# Altium PCB PCB1.PcbDoc
Units mil, origin at the board's own origin, x right, y up, seen from the top; angles counter-clockwise.
Board outline 3342 x 3050 mil, 2 copper layers (Top Layer, Bottom Layer); 9 components, 22 nets, 238 pads, 33 vias.
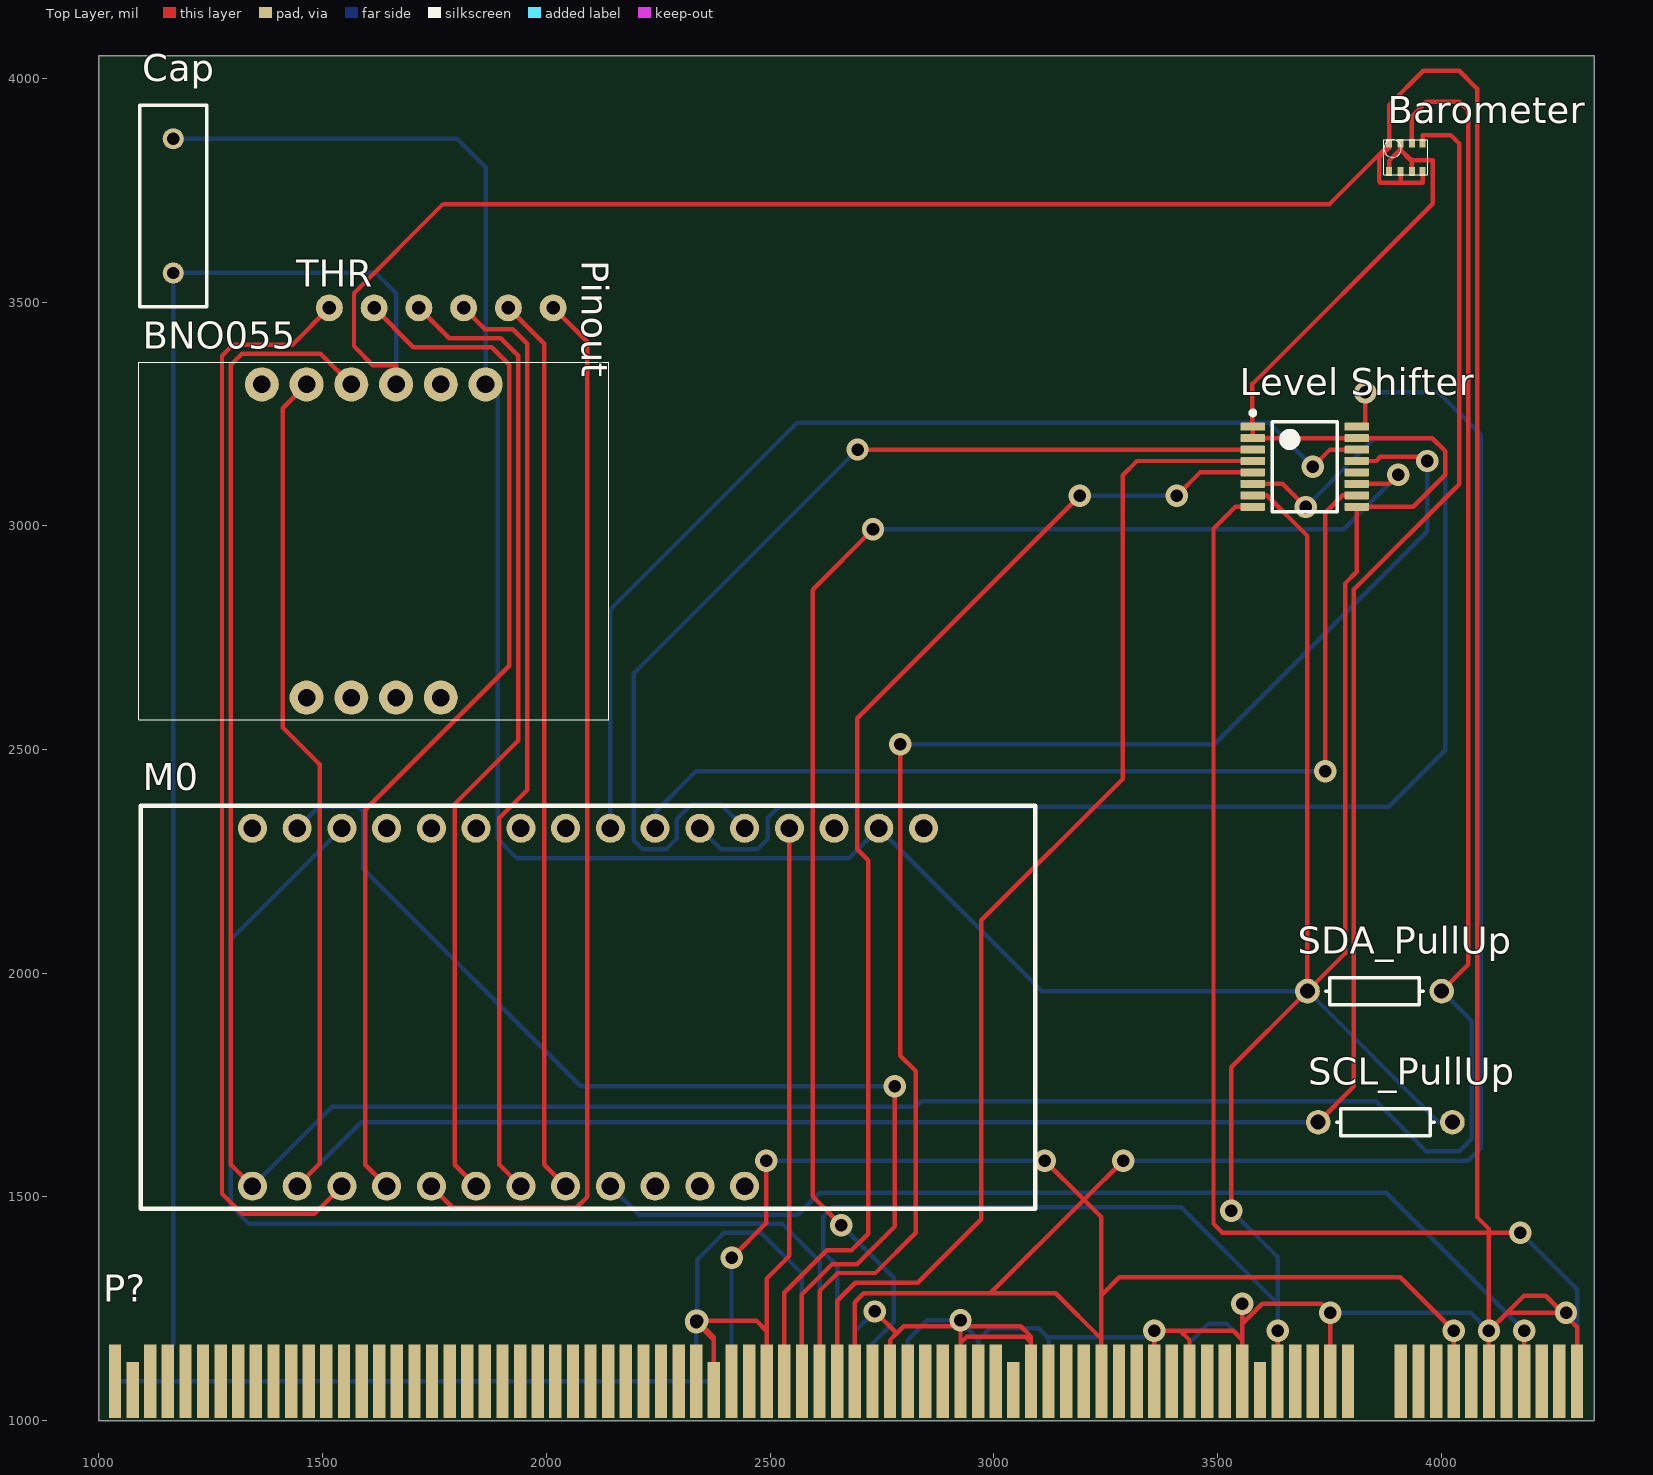
[diagram p0: Top Layer view]
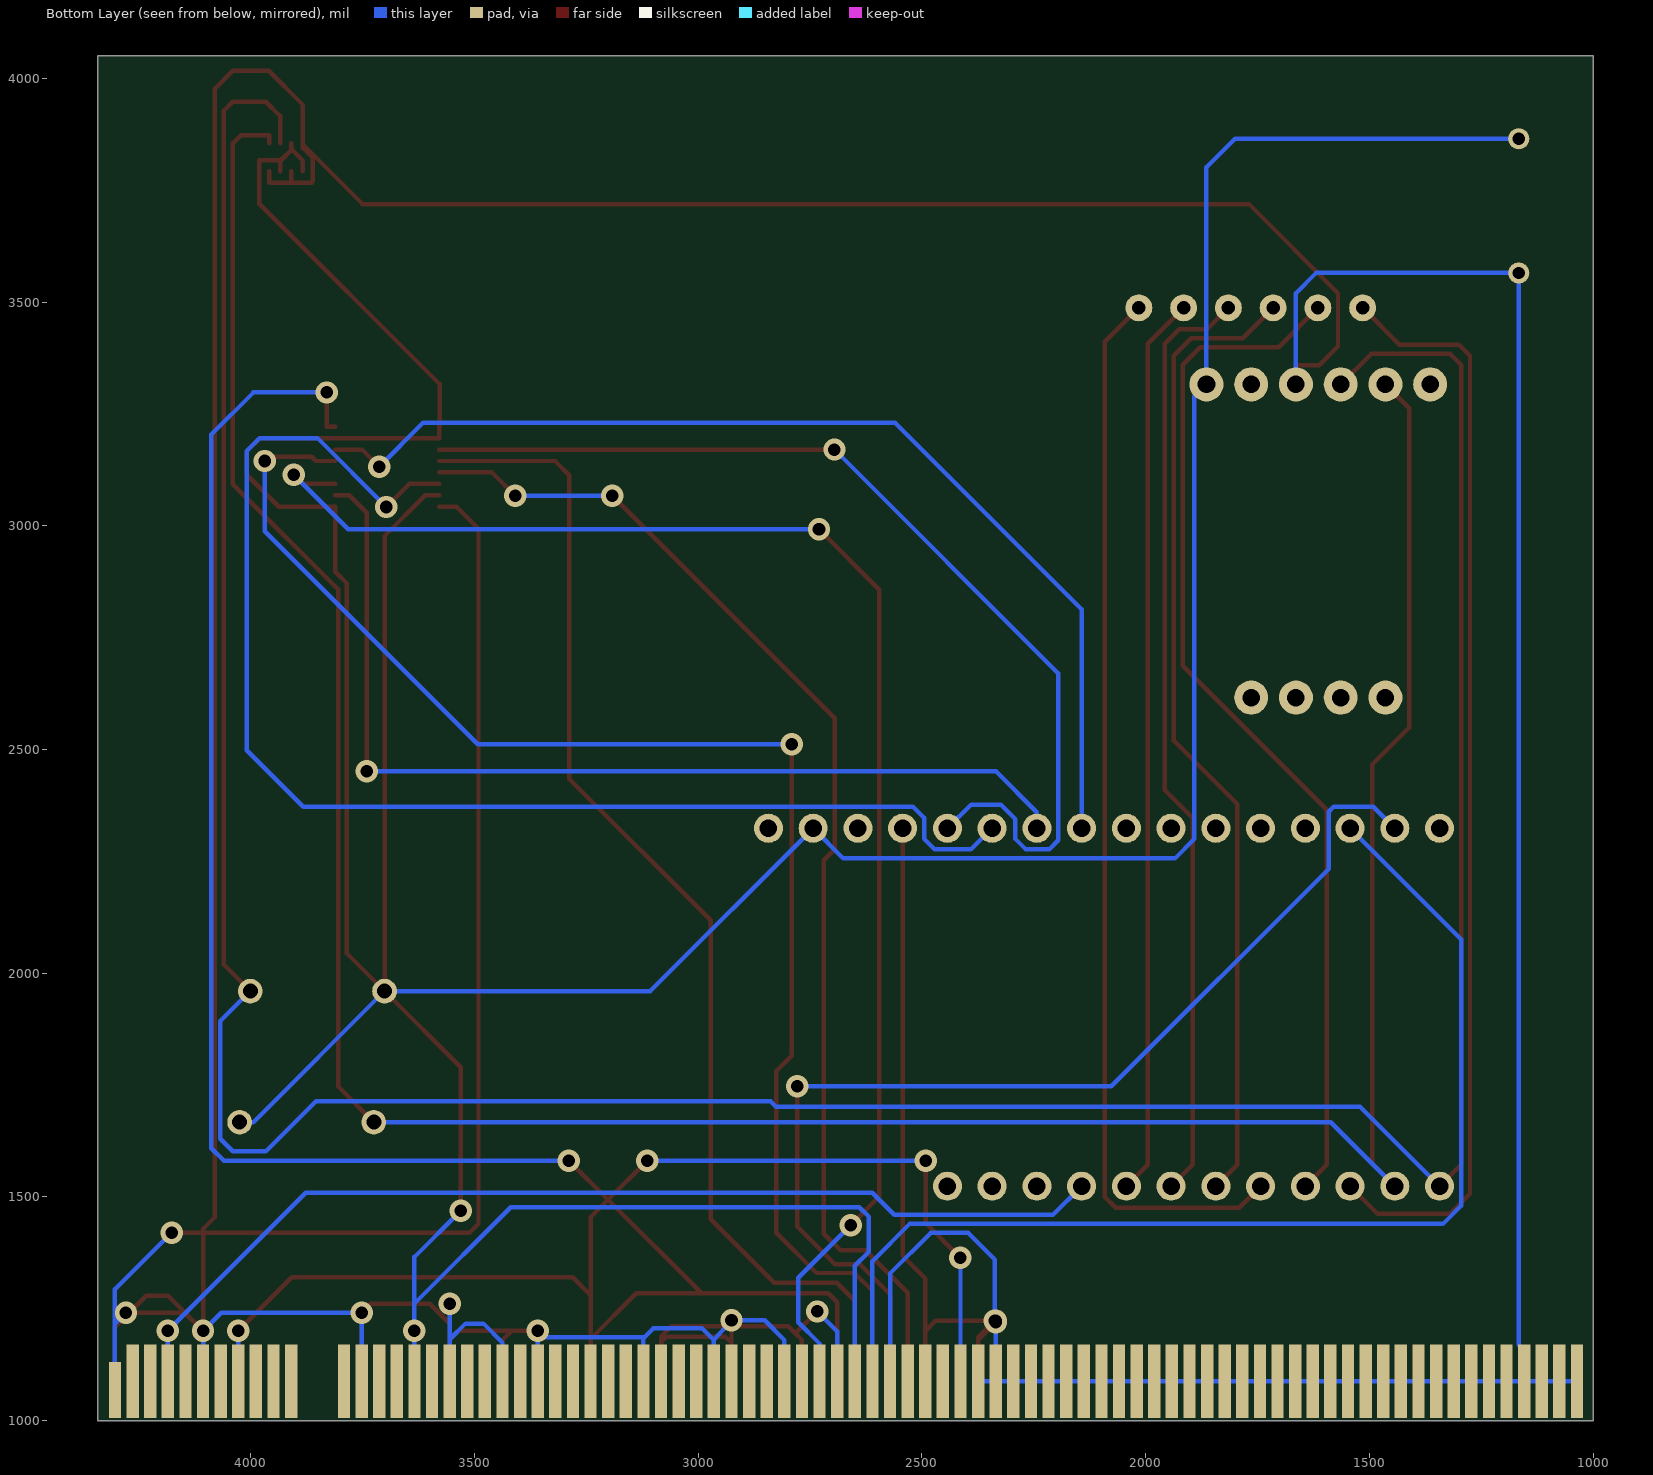
[diagram p1: Bottom Layer view, seen from below]

## Layer stack, top to bottom
Top Solder: solder mask 0.4, Solder Resist, Dk 3.5
Top Layer: signal copper 1.4
Dielectric 1: dielectric 12.6, FR-4, Dk 4.8
Bottom Layer: signal copper 1.4
Bottom Solder: solder mask 0.4, Solder Resist, Dk 3.5

## Board outline
1000,1000 4342,1000 4342,4050 1000,4050

## Design rules (kind name [scope] priority, off if disabled: settings)
Clearance [All] p1: gap=10 ignorepadtopadclearanceinfootprint=FALSE except(0: Arc-Hole Track-Hole SMDPad-Hole THPad-Hole Via-Hole Fill-Hole Poly-Hole Region-Hole Text-Hole)
PolygonConnect [All] p1: connectstyle=Relief reliefconductorwidth=10 reliefentries=4 polygonreliefangle="90 Angle" airgapwidth=10
RoutingVias [All] p1: holewidth=28 width=50 viastyle="Through Hole" minholewidth=28 minwidth=50 maxholewidth=28 maxwidth=50
SolderMaskExpansion [All] p1: expansion=4
Width [All] p1: maxlimit=10 minlimit=10 preferedwidth=10
30 further rules are at their usual default settings.

## Classes and differential pairs
component class U_FlightControllerBoard: Barometer BNO055 Cap "Level Shifter" M0 Pinout SCL_PullUp SDA_PullUp
component class PCIE: P?

## Components (designator, comment, footprint, x,y, rotation, side; value= is the part's Value field where it differs from the comment)
Barometer "BMP280" BMP280 3970.02,3784.13 r90 top
BNO055 "BNO055 Pinout" BNO055 2139,3366 r180 top
Cap "Cap" RAD-0.3 1166,3715 r90 top value=100pF
"Level Shifter" "CD40109BPWR" PW0016A_N 3695,3132 r0 top
M0 "M0_pinout" M0 3093,2374 r180 top
P? "PCIeX16-GF-2D-1000-1K-O164" PCIeX16-GF-2D-1000-1K-O164 3929.48,1088 r180 top
Pinout "Reciever Pinout" Reciever 1515,3487 r0 top
SCL_PullUp "Res1" AXIAL-0.3 3875,1667 r180 top value=1K
SDA_PullUp "Res1" AXIAL-0.3 3851,1960 r0 top value=1K

## Footprints (in the part's own frame and the unit in brackets; to place one, negate y for a bottom-side part, rotate by r counter-clockwise, add the part's x,y. Pads: shape width x height; smd on the part's side, far side on the other; paste and mask are expansions set on the pad)
AXIAL-0.3 [mm] "Axial Device, Thru-Hole; 2 Leads; 0.3 in Pin Spacing"
  round 1.4 hole 0.85: 1(-3.81,0) 2(3.81,0)
  silkscreen extent -2.77,-0.76 2.77,0.76
BMP280 [mm]
  rect 0.5x0.35 smd: CSB(1.8,1.55) GND(0.2,1.55) GND(1.8,2.2) SCK(1.8,0.3) SDI(1.8,0.9) SDO(0.2,0.3) VDD(0.2,2.2) VDDIO(0.2,0.9)
  silkscreen extent 0,0 2,2.5
BNO055 [mil]
  round 76 hole 39.37: 3VO(375,50) ADR(675,750) GND(475,50) INT(575,750) PS0(375,750) PS1(475,750) RST(775,50) SCL(675,50) SDA(575,50) VIN(275,50)
  silkscreen extent 0,0 1050,800
M0 [mil]
  round 65 hole 39.37: 3.3V(350,50) 5(1550,850) 6(1450,850) 9(1350,850) 10(1250,850) 11(1150,850) 12(1050,850) 13(950,850) A0(650,50) A1(750,50) A2(850,50) A3(950,50) A4(1050,50) A5(1150,50) ARf(450,50) BAT(650,850) En(750,850) GND(550,50) io1(1750,50) MIS(1450,50) MOS(1350,50) RST(250,50) RX0(1550,50) SCK(1250,50) SCL(1650,850) SDA(1750,850) TX1(1650,50) USB(850,850)
  silkscreen extent 0,0 2000,900
PCIeX16-GF-2D-1000-1K-O164 [mm] "Golden finger, PCIeX16, Dual, Opposite, Pitch 1mm, 164-Position"
  rect 0.7x3.2 smd far side paste-1: A1(-9.5,0.5)
  rect 0.7x4.2 smd far side paste-1: A2(-8.5,0) A3(-7.5,0) A4(-6.5,0) A5(-5.5,0) A6(-4.5,0) A7(-3.5,0) A8(-2.5,0) A9(-1.5,0) A10(-0.5,0) A11(0.5,0) A12(3.5,0) A13(4.5,0) A14(5.5,0) A15(6.5,0) A16(7.5,0) A17(8.5,0) A18(9.5,0) A19(10.5,0) A20(11.5,0) A21(12.5,0) A22(13.5,0) A23(14.5,0) A24(15.5,0) A25(16.5,0) A26(17.5,0) A27(18.5,0) A28(19.5,0) A29(20.5,0) A30(21.5,0) A31(22.5,0) A32(23.5,0) A33(24.5,0) A34(25.5,0) A35(26.5,0) A36(27.5,0) A37(28.5,0) A38(29.5,0) A39(30.5,0) A40(31.5,0) A41(32.5,0) A42(33.5,0) A43(34.5,0) A44(35.5,0) A45(36.5,0) A46(37.5,0) A47(38.5,0) A48(39.5,0) A49(40.5,0) A50(41.5,0) A51(42.5,0) A52(43.5,0) A53(44.5,0) A54(45.5,0) A55(46.5,0) A56(47.5,0) A57(48.5,0) A58(49.5,0) A59(50.5,0) A60(51.5,0) A61(52.5,0) A62(53.5,0) A63(54.5,0) A64(55.5,0) A65(56.5,0) A66(57.5,0) A67(58.5,0) A68(59.5,0) A69(60.5,0) A70(61.5,0) A71(62.5,0) A72(63.5,0) A73(64.5,0) A74(65.5,0) A75(66.5,0) A76(67.5,0) A77(68.5,0) A78(69.5,0) A79(70.5,0) A80(71.5,0) A81(72.5,0) A82(73.5,0)
  rect 0.7x4.2 smd paste-1: B1(-9.5,0) B2(-8.5,0) B3(-7.5,0) B4(-6.5,0) B5(-5.5,0) B6(-4.5,0) B7(-3.5,0) B8(-2.5,0) B9(-1.5,0) B10(-0.5,0) B11(0.5,0) B12(3.5,0) B13(4.5,0) B14(5.5,0) B15(6.5,0) B16(7.5,0) B18(9.5,0) B19(10.5,0) B20(11.5,0) B21(12.5,0) B22(13.5,0) B23(14.5,0) B24(15.5,0) B25(16.5,0) B26(17.5,0) B27(18.5,0) B28(19.5,0) B29(20.5,0) B30(21.5,0) B32(23.5,0) B33(24.5,0) B34(25.5,0) B35(26.5,0) B36(27.5,0) B37(28.5,0) B38(29.5,0) B39(30.5,0) B40(31.5,0) B41(32.5,0) B42(33.5,0) B43(34.5,0) B44(35.5,0) B45(36.5,0) B46(37.5,0) B47(38.5,0) B49(40.5,0) B50(41.5,0) B51(42.5,0) B52(43.5,0) B53(44.5,0) B54(45.5,0) B55(46.5,0) B56(47.5,0) B57(48.5,0) B58(49.5,0) B59(50.5,0) B60(51.5,0) B61(52.5,0) B62(53.5,0) B63(54.5,0) B64(55.5,0) B65(56.5,0) B66(57.5,0) B67(58.5,0) B68(59.5,0) B69(60.5,0) B70(61.5,0) B71(62.5,0) B72(63.5,0) B73(64.5,0) B74(65.5,0) B75(66.5,0) B76(67.5,0) B77(68.5,0) B78(69.5,0) B79(70.5,0) B80(71.5,0) B82(73.5,0)
  rect 0.7x3.2 smd paste-1: B17(8.5,0.5) B31(22.5,0.5) B48(39.5,0.5) B81(72.5,0.5)
PW0016A_N [mm] "SOP, 16-Leads, Body 5.1x4.5mm, Pitch 0.65mm, IPC Medium Density"
  rrect22% 1.4x0.45 smd: 1(-2.95,2.275) 2(-2.95,1.625) 3(-2.95,0.975) 4(-2.95,0.325) 5(-2.95,-0.325) 6(-2.95,-0.975) 7(-2.95,-1.625) 8(-2.95,-2.275) 9(2.95,-2.275) 10(2.95,-1.625) 11(2.95,-0.975) 12(2.95,-0.325) 13(2.95,0.325) 14(2.95,0.975) 15(2.95,1.625) 16(2.95,2.275)
  silkscreen extent -3.07,-2.55 1.85,3.17, body extent -3.21,-2.5 3.21,2.5, height 1
RAD-0.3 [mm] "Radial Cap, Thru-Hole; 2 Leads; 0.3 in Pin Spacing"
  round 1.2 hole 0.7: 1(-3.81,0) 2(3.81,0)
  silkscreen extent -5.71,-1.91 5.71,1.91
Reciever [mil]
  round 60 hole 30: KILL(400,0) PITCH(100,0) ROLL(200,0) SONAR(500,0) THR(0,0) YAW(300,0)

## Part data
Cap: "Capacitor", LatestRevisionDate=17-Jul-2002, LatestRevisionNote="Re-released for DXP Platform.", PackageDescription="Radial Cap, Thru-Hole; 2 Leads; 0.3 in Pin Spacing", PackageReference=RAD-0.3, Published=8-Jun-2000, Publisher="Altium Limited"
"Level Shifter": library part CMP-1527-00009-2, "CMOS Quad Low-to-High Voltage Level Shifter, 3 to 18 V, -55 to 125 degC, 16-Pin TSSOP (PW16), RoHS, Tape and Reel", Manufacturer="Texas Instruments", Package Reference=PW0016A, Temperature Range="-55 to 125 degC", ComponentLink1Description="Manufacturer URL", ComponentLink1URL=www.ti.com, ComponentLink2Description=Datasheet, ComponentLink2URL=http://www.ti.com/lit/ds/symlink/cd40109b.pdf, ComponentLink3Description="Package Specification", ComponentLink3URL=http://www.ti.com/lit/ml/mpds361/mpds361.pdf, DatasheetVersion=SCHS099B, Mounting Technology="Surface Mount", Number of Bits=4, Number of Channels=4, Number of Outputs=4, PackageDescription="16-Pin Plastic Small Outline Package, Body 5 x 4.4 mm, Pitch 0.65 mm", PackageVersion=4040064-4/G, Packing="Tape and Reel", PartNumber=CD40109BPWR, Propagation Delay="240 ns Max.", RoHS=TRUE, VSS="3 to 18 V"
P?: library part CMP-0001-00033-2, "Golden finger, PCIeX16, Dual, Opposite, Pitch 1mm, 164-Position", ClassName="Edge Connector", Datasheet Version="rev2.0, Apr-2007", Mating Connector=Molex-87715-9305, Package Reference=PCIeX16-GF-2D-1000-1K-O164, Publisher=Altium
SCL_PullUp SDA_PullUp: "Resistor", LatestRevisionDate=17-Jul-2002, LatestRevisionNote="Re-released for DXP Platform.", PackageDescription="Axial Device, Thru-Hole; 2 Leads; 0.3 in Pin Spacing", PackageReference=AXIAL-0.3, Published=8-Jun-2000, Publisher="Altium Limited"

## Via types
v1: diameter 50, hole 28, Top Layer to Bottom Layer, 33 vias

## Nets (pads, with @x,y where several pads share a name; then routed paths per layer and width w, separated by ;. In a path a pad name is that pad's centre, name@x,y a point inside that pad or via, vN(x,y) a via of type N, cw(c..) or ccw(c..) an arc to the next point about the centre after c; other vN are vias at no path point)
3.3V: "Level Shifter.1" "Level Shifter.2" "Level Shifter.7" "Level Shifter.9" "Level Shifter.15" Barometer.CSB Barometer.VDD Barometer.VDDIO BNO055.VIN Cap.2 M0.3.3V P?.A16 P?.A41 P?.B16 SCL_PullUp.1 SDA_PullUp.1 | length 11328.1
  Top Layer w10: v1(3531,1469) 3531,1790 SDA_PullUp.1 ; 3578.86,3068.02 3610,3068.02 3701,2977.02 SDA_PullUp.1 ; P?.B16 v1(3634.2,1201) ; Barometer.VDD 3883.41,3815.99 3908.21,3840.79 ; Barometer.VDDIO 3934.59,3817 ; SDA_PullUp.1 3785,2044 3785,2871 3811.14,2897.14 3811.14,3042.43 3937.43,3042.43 4009,3114 4009,3166.98 3980,3195.98 3811.14,3195.98 3578.86,3195.98 3578.86,3221.57 3578,3221.57 3578,3317 3981,3720 3981,3817 3934.59,3817 ; 3908.21,3840.79 3932,3817 3934.59,3817 ; 3908.21,3840.79 3909,3841.58 Barometer.CSB 3908.21,3840.79 ; 3908.21,3840.79 3934.59,3817
  Bottom Layer w10: Cap.2 1800,3865 1864,3801 BNO055.VIN 1891,3289 1891,2300 1934.5,2256.5 2675.5,2256.5 M0.3.3V 3107,1960 SDA_PullUp.1 3994,1667 SCL_PullUp.1 ; P?.A41 2649.95,1346.05 2619,1377 2619,1456 2640,1477 3419.14,1477 3634.2,1261.94 ; v1(3531,1469) 3634.2,1365.8 3634.2,1261.94 ; P?.A16 v1(3634.2,1201) 3634.2,1261.94
5V: "Level Shifter.16" P?.A8 P?.A47 P?.B8 P?.B26 P?.B40 | length 6881.3
  Top Layer w10: v1(2414,1364) 2491,1441 v1(2491,1581) ; P?.B40 2689.32,1264.33 2709.32,1284.33 2992.33,1284.33 ; v1(3114,1581) 3201.5,1493.5 ; P?.B26 3240.5,1182.5 ; v1(3289,1581) 3201.5,1493.5 ; 3811.14,3221.57 3830,3221.57 v1(3830,3298) ; v1(4028,1201) v1(4028,1201) ; 2992.33,1284.33 3201.5,1493.5 ; 2992.33,1284.33 3138.67,1284.33 3240.5,1182.5 ; 3201.5,1493.5 3240.5,1454.5 3240.5,1280 ; 3240.5,1182.5 3240.5,1280 ; 3240.5,1280 3280.68,1320.18 3908.73,1320.18 v1(4028,1201) ; v1(4028,1201) 4027.9,1200.9 P?.B8 v1(4028,1201)
  Bottom Layer w10: P?.A47 2413.73,1363.73 v1(2414,1364) ; v1(2491,1581) v1(3114,1581) ; v1(3289,1581) 4060,1581 4088,1609 4088,3204 3994,3298 v1(3830,3298) ; P?.A8 4027.9,1200.9 v1(4028,1201)
BL_MOTOR: "Level Shifter.11" P?.A39 | length 3380.7
  Top Layer w10: v1(2659,1437) 2595,1501 2595,2857 v1(2730,2992) ; 3811.14,3093.61 3883.61,3093.61 v1(3904,3114)
  Bottom Layer w10: v1(2659,1437) 2776.47,1319.53 2776.47,1220 2728.69,1172.23 P?.A39 ; v1(2730,2992) 3782,2992 v1(3904,3114)
BL_MOTOR_3.3: "Level Shifter.10" M0.A2 | length 2236
  Top Layer w10: v1(3741,2451) 3741,3029.02 3780,3068.02 3811.14,3068.02
  Bottom Layer w10: M0.A2 2243,2360 2334,2451 v1(3741,2451)
BR_MOTOR: "Level Shifter.4" P?.B41 | length 2675.2
  Top Layer w10: P?.B41 2649.95,1267.94 2690,1307.99 2829.99,1307.99 2972,1450 2972,2118 3288,2434 3288,3112.8 3320,3144.8 3578.86,3144.8
BR_MOTOR_3.3: "Level Shifter.3" M0.A0 | length 2310
  Top Layer w10: v1(2695.39,3170.39) 3578.86,3170.39
  Bottom Layer w10: M0.A0 2390,2377 2324,2377 2291,2344 2291,2300 2267.5,2276.5 2215.5,2276.5 2195,2297 2195,2670 v1(2695.39,3170.39)
FL_MOTOR: "Level Shifter.13" P?.B42 | length 3274.1
  Top Layer w10: P?.B42 2610.58,1289.6 2650.89,1329.9 2735.5,1329.9 2825.21,1419.61 2825.21,1781.36 2791,1815.57 v1(2791,2512) ; 3811.14,3144.8 3854.8,3144.8 3864,3154 3959.8,3154 v1(3969,3144.8)
  Bottom Layer w10: v1(2791,2512) 3493,2512 3969,2988 v1(3969,3144.8)
FL_MOTOR_3.3: "Level Shifter.14" M0.A3 | length 2386.4
  Top Layer w10: v1(3713,3132) 3751.39,3170.39 3811.14,3170.39
  Bottom Layer w10: M0.A3 2143,2813 2560,3230 3615,3230 v1(3713,3132)
FR_MOTOR: "Level Shifter.5" P?.B44 | length 2713.7
  Top Layer w10: P?.B44 2531.84,1286.08 2626.27,1380.51 2682.01,1380.51 2719.23,1417.72 2719.23,2252.77 2695,2277 2695,2570 v1(3192,3067) ; v1(3408.8,3067) 3461,3119.2 3578.86,3119.2
  Bottom Layer w10: v1(3192,3067) v1(3408.8,3067)
FR_MOTOR_3.3: "Level Shifter.6" M0.A1 | length 3001.3
  Top Layer w10: 3578.86,3093.61 3645.39,3093.61 v1(3697,3042)
  Bottom Layer w10: M0.A1 2390.5,2276.5 2471.5,2276.5 2495,2300 2495,2347 2520,2372 3883,2372 4009,2498 4009,3167 3980,3196 3851,3196 v1(3697,3042)
GND: "Level Shifter.8" Barometer.GND Barometer.SDO BNO055.GND Cap.1 M0.GND P?.A1 P?.A6 P?.A13 P?.A18 P?.A21 P?.A23 P?.A29 P?.A33 P?.A37 P?.A40 P?.A43 P?.A48 P?.A49 P?.A50 P?.A51 P?.A52 P?.A53 P?.A54 P?.A55 P?.A56 P?.A57 P?.A58 P?.A59 P?.A60 P?.A61 P?.A62 P?.A63 P?.A64 P?.A65 P?.A66 P?.A67 P?.A68 P?.A69 P?.A70 P?.A71 P?.A72 P?.A73 P?.A74 P?.A75 P?.A76 P?.A77 P?.A78 P?.A79 P?.A80 P?.A81 P?.A82 P?.B1 P?.B6 P?.B13 P?.B18 P?.B21 P?.B23 P?.B30 P?.B34 P?.B38 P?.B45 P?.B48 | length 20737.5
  Top Layer w10: BNO055.GND 1664,3359 1612,3359 1570,3401 1570,3520 1769,3719 3750.41,3719 Barometer.GND@3883.41,3852 ; v1(2334.99,1220) 2374.36,1180.63 ; v1(2334.99,1223) v1@2337.36,1223 ; v1(2337,1223.36) v1@2337.36,1223 ; P?.B48 2374.36,1180.63 ; P?.B45 2492.47,1200 ; M0.GND 2543,1368 2492.47,1317.47 2492.47,1200 ; v1(2734,1244) 2783.03,1194.97 ; P?.B38 2768.06,1180 2783.03,1194.97 ; P?.B34 2925.54,1173.5 ; v1(2925.54,1224) v1@2925.54,1210.98 ; P?.B30 3083.02,1174.93 ; P?.B23 v1@3358.61,1200.61 ; v1(3358.61,1201) v1@3358.61,1200.61 ; v1(3359,1201) 3416.35,1201 3416.74,1200.61 ; P?.B21 3437.35,1180 3416.74,1200.61 ; v1(3555,1261) 3555.46,1260.54 3555.46,1216.46 ; P?.B18 3555.46,1180 ; 3578.86,3042.43 3540,3042.43 3491,2993.43 3491,1440 3511,1420 4106.65,1420 ; P?.B13 v1(3752.31,1241) 3732.31,1261 3600,1261 3555.46,1216.46 ; Barometer.GND@3909,3792.01 3909,3767 ; Barometer.SDO 3958.21,3767 3909,3767 ; P?.B6 v1(4106.65,1200.68) ; v1(4177,1420) 4106.65,1420 ; v1(4279,1241) v1@4271.5,1241 ; P?.B1 4303.5,1209 v1@4271.5,1241 ; v1@2337.36,1223 2469.47,1223 2492.47,1200 ; v1@2337.36,1223 2374.36,1186 2374.36,1180.63 ; 2783.03,1194.97 2799.04,1210.98 v1@2925.54,1210.98 ; 2925.54,1173.5 v1@2925.54,1210.98 ; 2925.54,1173.5 2940,1187.96 3070,1187.96 3083.02,1174.93 ; v1@2925.54,1210.98 3060,1210.98 3083.02,1187.96 3083.02,1174.93 ; v1@3358.61,1200.61 3416.74,1200.61 ; 3416.74,1200.61 3534.85,1200.61 3555.46,1180 ; 3555.46,1180 3555.46,1216.46 ; Barometer.GND@3883.41,3852 3883.41,3844.28 3861,3821.87 3861,3770 3864,3767 3909,3767 ; Barometer.GND@3883.41,3852 3883.41,3855 3883.41,3940.41 3960,4017 4040,4017 4080,3977 4080,1455 4106.65,1428.35 4106.65,1420 ; v1(4106.65,1200.68) 4106.65,1420 ; v1(4106.65,1200.68) 4147.65,1241 v1@4271.5,1241 ; v1(4106.65,1200.68) 4184.97,1279 4233.5,1279 v1@4271.5,1241
  Bottom Layer w10: P?.A82 P?.A81 P?.A80 P?.A79 ; BNO055.GND 1664,3520 1619,3565 Cap.1 1166,1169.11 1153.89,1157 P?.A79 ; v1(2334.99,1223) v1(2334.99,1220) P?.A49 ; v1(2337,1223.36) 2337,1360 2396.5,1419.5 2480.5,1419.5 2571.21,1328.79 P?.A43 ; P?.A48 P?.A49 ; P?.A40 2689.32,1199.32 v1(2734,1244) ; P?.A37 2807.43,1180 2851.43,1224 v1(2925.54,1224) 2964.91,1180 ; P?.A33 2964.91,1180 ; P?.A29 3122.39,1184.25 ; P?.A23 v1@3358.61,1186 ; v1(3358.61,1201) v1@3358.61,1200.61 ; v1(3359,1201) v1@3358.61,1200.61 ; P?.A21 3437.35,1174.35 3480,1217 3520,1217 3555.46,1181.54 ; v1(3555,1261) 3555.46,1260.54 3555.46,1181.54 ; P?.A18 3555.46,1181.54 ; P?.A13 v1(3752.31,1241) 4065.65,1241 v1@4106.65,1200 ; P?.A6 v1@4106.65,1200 ; v1(4106.65,1200.68) v1@4106.65,1200 ; v1(4177,1420) 4303.5,1293.5 4303.5,1216.5 ; v1(4279,1241) 4303.5,1216.5 ; P?.A1 4303.5,1216.5 ; P?.A79 P?.A78 P?.A77 P?.A76 P?.A75 P?.A74 P?.A73 P?.A72 P?.A71 P?.A70 P?.A69 P?.A68 P?.A67 P?.A66 P?.A65 P?.A64 P?.A63 P?.A62 P?.A61 P?.A60 P?.A59 P?.A58 P?.A57 P?.A56 P?.A55 P?.A54 P?.A53 P?.A52 P?.A51 P?.A50 P?.A49 ; 2964.91,1180 2991.56,1206.65 3100,1206.65 3122.39,1184.25 ; 3122.39,1184.25 3122.39,1186 v1@3358.61,1186 ; v1@3358.61,1186 v1@3358.61,1200.61
KILL: M0.13 P?.A4 P?.B4 | length 2442.8
  Top Layer w10: P?.B4 v1(4185.39,1201)
  Bottom Layer w10: M0.13 2207,1460 2562,1460 2611,1509 3877.39,1509 v1(4185.39,1201) P?.A4
KILL_RC_PIN: M0.12 Pinout.KILL | length 2016
  Top Layer w10: Pinout.KILL 1995,3407 1995,1572 M0.12
PITCH_RC_PIN: M0.6 Pinout.PITCH | length 2343.9
  Top Layer w10: Pinout.PITCH 1702.75,3399.25 1877.75,3399.25 1917,3360 1917,2687 1595,2365 1595,1572 M0.6
ROLL_RC_PIN: M0.10 Pinout.ROLL | length 2201.2
  Top Layer w10: Pinout.ROLL 1782.75,3419.25 1898.1,3419.25 1937,3380.35 1937,2520 1795,2378 1795,1572 M0.10
RX: M0.RX0 P?.A42 | length 2581.9
  Bottom Layer w10: M0.RX0 1295,2076 1295,1480 1335.5,1439.5 2527.5,1439.5 2610.58,1356.42 P?.A42
SCL: Barometer.SCK BNO055.SCL M0.SCL SCL_PullUp.2 | length 6634.8
  Top Layer w10: M0.SCL 1493,1574 1493,2467 1411,2549 1411,3263 BNO055.SCL ; SCL_PullUp.2 3805,1747 3805,2858 4040,3093 4040,3854.47 4021.79,3872.68 3958.21,3872.68 Barometer.SCK
  Bottom Layer w10: M0.SCL 1586,1667 SCL_PullUp.2
SDA: Barometer.SDI BNO055.SDA M0.SDA SDA_PullUp.2 | length 7582.8
  Top Layer w10: M0.SDA 1295,1572 1295,3360 1319,3384 1496,3384 BNO055.SDA ; Barometer.SDI 3934.59,3916 3966.59,3948 4040,3948 4060,3928 4060,2019 SDA_PullUp.2
  Bottom Layer w10: M0.SDA 1520,1701 2825.21,1701 2838.21,1714 3854,1714 3966,1602 4040,1602 4068,1630 4068,1893 SDA_PullUp.2
SONAR: M0.9 Pinout.SONAR | length 2396.3
  Top Layer w10: M0.9 1791,1476 2067,1476 2091,1500 2091,3411 Pinout.SONAR
THROTTLE_RC_PIN: M0.5 Pinout.THR | length 2469.6
  Top Layer w10: Pinout.THR 1433,3405 1300,3405 1275,3380 1275,1507 1320,1462 1481,1462 M0.5
TX: M0.TX1 P?.B43 | length 2467.5
  Top Layer w10: P?.B43 2571.21,1282.09 2639.02,1349.9 2694.73,1349.9 2779,1434.17 v1(2779,1747)
  Bottom Layer w10: M0.TX1 1491,2372 1580,2372 1591,2361 1591,2233 2077,1747 v1(2779,1747)
YAW_RC_PIN: M0.11 Pinout.YAW | length 2103.6
  Top Layer w10: Pinout.YAW 1862.75,3439.25 1924.5,3439.25 1957,3406.75 1957,2409.53 1895,2347.53 1895,1572 M0.11
pads on no net: "Level Shifter.12" BNO055.3VO BNO055.ADR BNO055.INT BNO055.PS0 BNO055.PS1 BNO055.RST M0.A4 M0.A5 M0.ARf M0.BAT M0.En M0.io1 M0.MIS M0.MOS M0.RST M0.SCK M0.USB P?.A2 P?.A3 P?.A5 P?.A7 P?.A9 P?.A10 P?.A11 P?.A12 P?.A14 P?.A15 P?.A17 P?.A19 P?.A20 P?.A22 P?.A24 P?.A25 P?.A26 P?.A27 P?.A28 P?.A30 P?.A31 P?.A32 P?.A34 P?.A35 P?.A36 P?.A38 P?.A44 P?.A45 P?.A46 P?.B2 P?.B3 P?.B5 P?.B7 P?.B9 P?.B10 P?.B11 P?.B12 P?.B14 P?.B15 P?.B17 P?.B19 P?.B20 P?.B22 P?.B24 P?.B25 P?.B27 P?.B28 P?.B29 P?.B31 P?.B32 P?.B33 P?.B35 P?.B36 P?.B37 P?.B39 P?.B46 P?.B47 P?.B49 P?.B50 P?.B51 P?.B52 P?.B53 P?.B54 P?.B55 P?.B56 P?.B57 P?.B58 P?.B59 P?.B60 P?.B61 P?.B62 P?.B63 P?.B64 P?.B65 P?.B66 P?.B67 P?.B68 P?.B69 P?.B70 P?.B71 P?.B72 P?.B73 P?.B74 P?.B75 P?.B76 P?.B77 P?.B78 P?.B79 P?.B80 P?.B81 P?.B82

## Text inside footprints (layer, text, board x,y; h text height)
Pinout: Top Overlay "THR" at 1441.18,3534.24 h60